# Altium PCB NearField_PCB_Probes.PcbDoc
Units mm, origin at the board's own origin, x right, y up, seen from the top; angles counter-clockwise.
Board outline 100.07 x 27.53 mm, 4 copper layers (Top Layer, Layer 1, Layer 2, Bottom Layer), stack 1.57 mm thick; 2 components, 3 nets, 39 pads, 966 vias.
Unrouted connection lines stored in the file: 961.
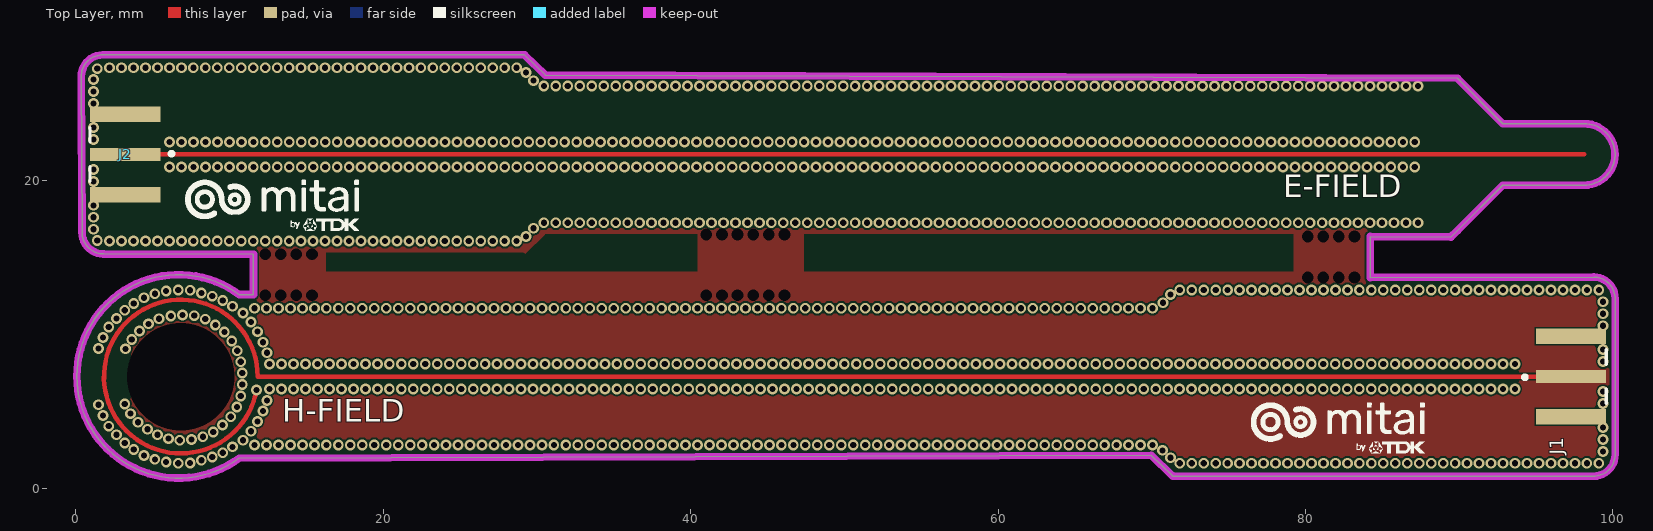
[diagram p0: Top Layer view]
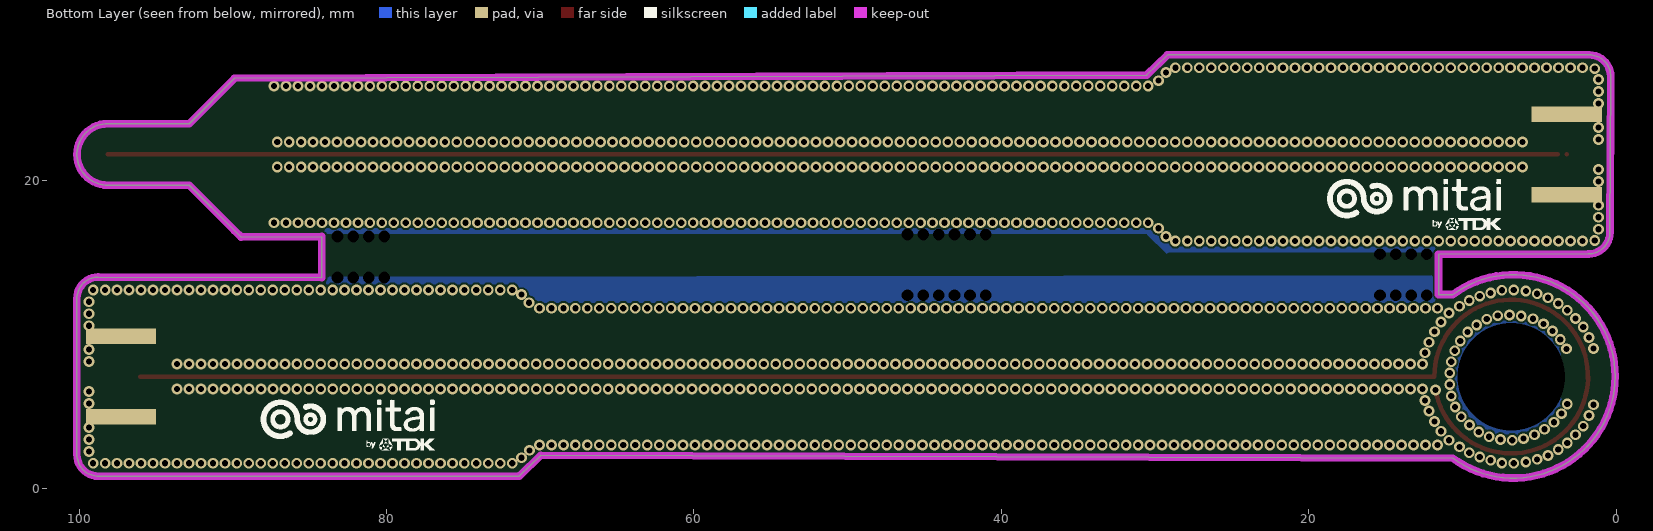
[diagram p1: Bottom Layer view, seen from below]
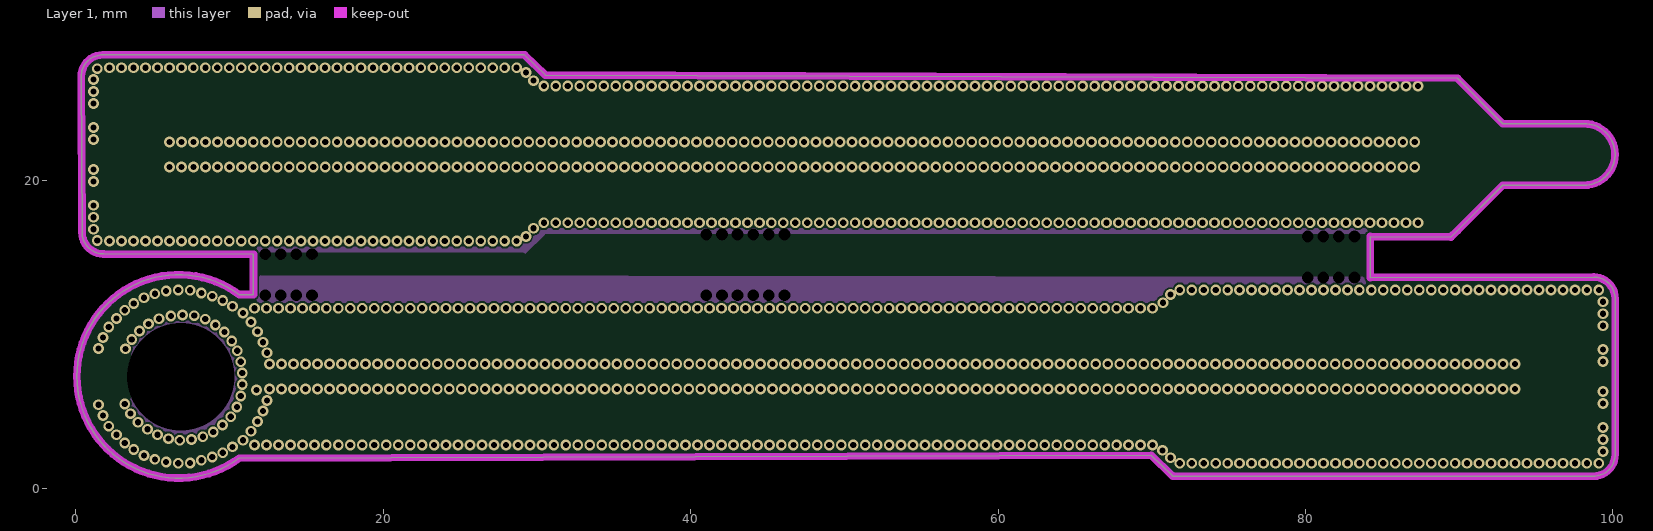
[diagram p2: Layer 1]
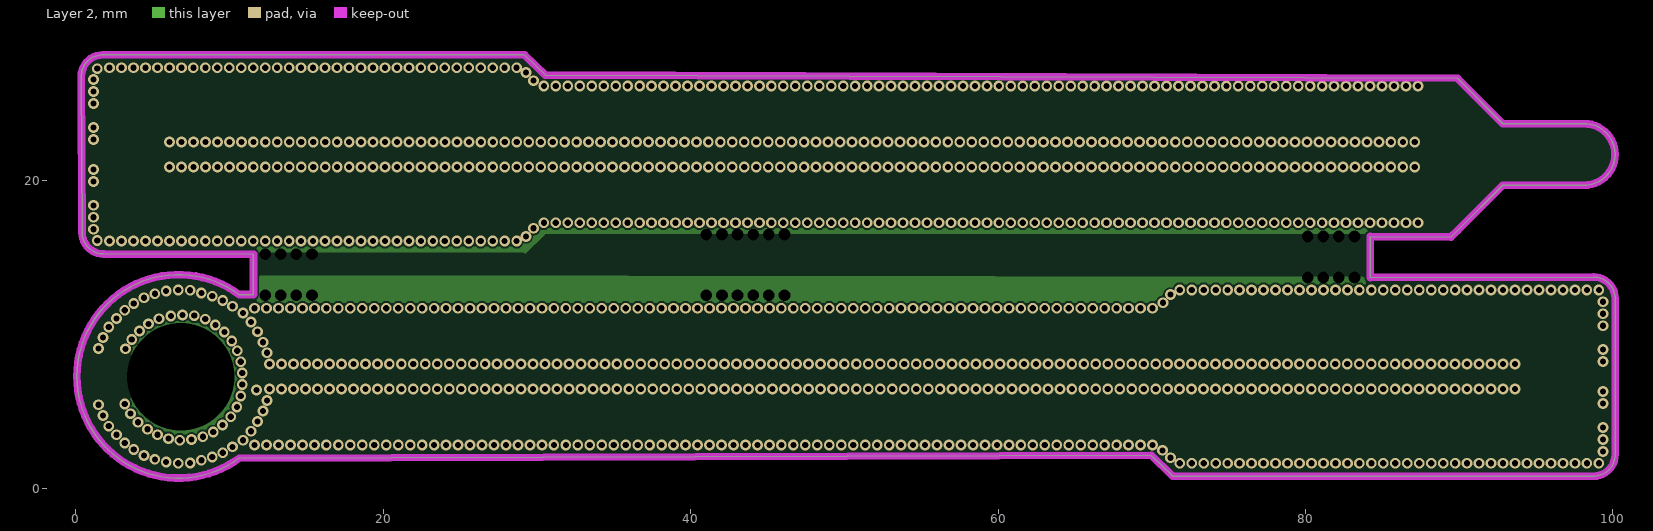
[diagram p3: Layer 2]

## Layer stack, top to bottom
Top Solder: solder mask 0.0127, Solder Resist, Dk 3.8
Top Layer: signal copper 0.035
Dielectric 2: prepreg 0.2, PP-006, Dk 4.6
Layer 1: signal copper 0.0175
Dielectric 1: dielectric 1.065, FR-4, Dk 4.6
Layer 2: signal copper 0.0175
Dielectric 3: prepreg 0.2, PP-006, Dk 4.6
Bottom Layer: signal copper 0.035
Bottom Solder: solder mask 0.0127, Solder Resist, Dk 3.8

## Board outline
10.627,1.965 cw(c6.692,7.287) 10.627,12.608 11.557,12.608 11.557,15.24 1.808,15.248 cw(c1.808,16.645) 0.411,16.645 0.359,26.803 cw(c1.757,26.803) 1.757,28.201 29.187,28.201 30.55,26.886 89.881,26.68 92.837,23.724 98.135,23.724 cw(c98.135,21.724) 98.135,19.724 98.135,19.728 92.837,19.728 92.837,19.724 89.881,16.769 89.461,16.351 84.201,16.383 84.201,13.716 98.743,13.749 cw(c98.743,12.352) 100.141,12.352 100.141,2.194 cw(c98.743,2.194) 98.743,0.796 71.413,0.796 cw(c71.413,0.924) 71.325,0.832 69.962,2.146

## Design rules (kind name [scope] priority, off if disabled: settings)
Clearance [All] p1: gap=0.127 ignorepadtopadclearanceinfootprint=FALSE
DiffPairsRouting [All] p1: maxlimit=0.254 minlimit=0.254 mostfreqgap=0.254 toplayer_minwidth=0.381 toplayer_maxwidth=0.381 toplayer_prefwidth=0.381 midlayer1_minwidth=0.381 midlayer1_maxwidth=0.381 midlayer1_prefwidth=0.381 midlayer2_minwidth=0.381 midlayer2_maxwidth=0.381 midlayer2_prefwidth=0.381 bottomlayer_minwidth=0.381 bottomlayer_maxwidth=0.381 bottomlayer_prefwidth=0.381 substack1={56D14EC7-D852-4B65-881B-8272149A35F8} toplayer_{56d14ec7-d852-4b65-881b-8272149a35f8}_minwidth=0.381 toplayer_{56d14ec7-d852-4b65-881b-8272149a35f8}_maxwidth=0.381 toplayer_{56d14ec7-d852-4b65-881b-8272149a35f8}_prefwidth=0.381 midlayer1_{56d14ec7-d852-4b65-881b-8272149a35f8}_minwidth=0.381 midlayer1_{56d14ec7-d852-4b65-881b-8272149a35f8}_maxwidth=0.381 midlayer1_{56d14ec7-d852-4b65-881b-8272149a35f8}_prefwidth=0.381 midlayer2_{56d14ec7-d852-4b65-881b-8272149a35f8}_minwidth=0.381 midlayer2_{56d14ec7-d852-4b65-881b-8272149a35f8}_maxwidth=0.381 midlayer2_{56d14ec7-d852-4b65-881b-8272149a35f8}_prefwidth=0.381 bottomlayer_{56d14ec7-d852-4b65-881b-8272149a35f8}_minwidth=0.381 bottomlayer_{56d14ec7-d852-4b65-881b-8272149a35f8}_maxwidth=0.381 bottomlayer_{56d14ec7-d852-4b65-881b-8272149a35f8}_prefwidth=0.381 maxuncoupledlength=12.7
PolygonConnect PolygonConnect_5 [All vs IsNamedPolygon('NONET_L-01_P-001')] p1: connectstyle=Direct reliefconductorwidth=0.254 reliefentries=4 polygonreliefangle="90 Angle" airgapwidth=0.254
PolygonConnect PolygonConnect_4 [All vs IsNamedPolygon('PROBE_H_L04_P003')] p2: connectstyle=Direct reliefconductorwidth=0.254 reliefentries=4 polygonreliefangle="90 Angle" airgapwidth=0.254
PolygonConnect PolygonConnect_3 [All vs IsNamedPolygon('PROBE_H_L03_P002')] p3: connectstyle=Direct reliefconductorwidth=0.254 reliefentries=4 polygonreliefangle="90 Angle" airgapwidth=0.254
PolygonConnect PolygonConnect_2 [All vs IsNamedPolygon('PROBE_H_L02_P001')] p4: connectstyle=Direct reliefconductorwidth=0.254 reliefentries=4 polygonreliefangle="90 Angle" airgapwidth=0.254
PolygonConnect PolygonConnect_1 [All vs IsNamedPolygon('PROBE_H_L01_P000')] p5: connectstyle=Direct reliefconductorwidth=0.254 reliefentries=4 polygonreliefangle="90 Angle" airgapwidth=0.254
PolygonConnect [All] p6: connectstyle=Relief reliefconductorwidth=0.254 reliefentries=4 polygonreliefangle="90 Angle" airgapwidth=0.254
RoutingVias [All] p1: holewidth=0.6 width=1.27 viastyle="Through Hole" minholewidth=0.4 minwidth=0.6 maxholewidth=0.711 maxwidth=2
SolderMaskExpansion [All] p1: expansion=0.102 istentingtop=FALSE
Width [All] p1: maxlimit=0.381 minlimit=0.254 preferedwidth=0.293 substack1={56D14EC7-D852-4B65-881B-8272149A35F8}
29 further rules are at their usual default settings.

## Classes and differential pairs
component class NearField_E_Probe: J2
component class NearField_H_Probe: J1

## Components (designator, comment, footprint, x,y, rotation, side; value= is the part's Value field where it differs from the comment)
J1 "SMA" "SMA Edge Launch (Horizontal)" 104.313,7.274 r270 top
J2 "SMA" "SMA Edge Launch (Horizontal)" -3.813,21.724 r90 top

## Footprints (in the part's own frame and the unit in brackets; to place one, negate y for a bottom-side part, rotate by r counter-clockwise, add the part's x,y. Pads: shape width x height; smd on the part's side, far side on the other; paste and mask are expansions set on the pad)
"SMA Edge Launch (Horizontal)" [mm]
  rect 0.85x4.56 smd paste+0 mask+0: 1(0,-7.03)
  rect 1x4.56 smd paste+0 mask+0: 2(-2.62,-7.03) 2(2.62,-7.03)
  rect 1x4.56 smd far side paste+0 mask+0: 2(-2.62,-7.03) 2(2.62,-7.03)
  silkscreen extent -1.75,-10.17 1.75,-4.75, body extent -3.19,-8.25 3.19,5.05, height 3.58

## Part data
J1 J2: "SMA Connector", Supplier Part Number 1=A97594-ND, Supplier 1=Digi-Key

## Free pads (board coordinates)
  round 0 hole 7: 2(6.835,7.274)
  round 0 hole 0.762: 3(12.319,12.573) 3(12.319,15.24) 3(13.335,12.573) 3(13.335,15.24) 3(14.351,12.573) 3(14.351,15.24) 3(15.367,12.573) 3(15.367,15.24) 3(41.021,12.573) 3(41.021,16.51) 3(42.037,12.573) 3(42.037,16.51) 3(43.053,12.573) 3(43.053,16.51) 3(44.069,12.573) 3(44.069,16.51) 3(45.085,12.573) 3(45.085,16.51) 3(46.101,12.573) 3(46.101,16.51) 3(80.137,13.716) 3(80.137,16.383) 3(81.153,13.716) 3(81.153,16.383) 3(82.169,13.716) 3(82.169,16.383) 3(83.185,13.716) 3(83.185,16.383)

## Via types
v1: diameter 0.7, hole 0.4, Top Layer to Bottom Layer, tented both sides, 966 vias

## Nets (pads, with @x,y where several pads share a name; then routed paths per layer and width w, separated by ;. In a path a pad name is that pad's centre, name@x,y a point inside that pad or via, vN(x,y) a via of type N, cw(c..) or ccw(c..) an arc to the next point about the centre after c; other vN are vias at no path point)
GND: J1.2 J2.2
  other v1: 6.668,1.635 71.819,1.635 72.598,1.635 73.377,1.635 74.156,1.635 74.935,1.635 75.713,1.635 76.492,1.635 77.271,1.635 78.05,1.635 78.829,1.635 79.608,1.635 80.387,1.635 81.166,1.635 81.945,1.635 82.724,1.635 83.503,1.635 84.282,1.635 85.061,1.635 85.84,1.635 86.619,1.635 87.397,1.635 88.176,1.635 88.955,1.635 89.734,1.635 90.513,1.635 91.292,1.635 92.071,1.635 92.85,1.635 93.629,1.635 94.408,1.635 95.187,1.635 95.966,1.635 96.745,1.635 97.524,1.635 98.302,1.635 99.081,1.635 7.44,1.657 5.881,1.711 8.171,1.83 5.144,1.889 71.209,1.991 8.878,2.041 4.433,2.143 9.564,2.321 99.353,2.405 70.701,2.473 3.772,2.524 10.199,2.703 11.629,2.829 12.408,2.829 13.187,2.829 13.966,2.829 14.745,2.829 15.524,2.829 16.303,2.829 17.082,2.829 17.861,2.829 18.64,2.829 19.419,2.829 20.198,2.829 20.977,2.829 21.756,2.829 22.534,2.829 23.313,2.829 24.092,2.829 24.871,2.829 25.65,2.829 26.429,2.829 27.208,2.829 27.987,2.829 28.766,2.829 29.545,2.829 30.324,2.829 31.103,2.829 31.882,2.829 32.661,2.829 33.439,2.829 34.218,2.829 34.997,2.829 35.776,2.829 36.555,2.829 37.334,2.829 38.113,2.829 38.892,2.829 39.671,2.829 40.45,2.829 41.229,2.829 42.008,2.829 42.787,2.829 43.566,2.829 44.345,2.829 45.123,2.829 45.902,2.829 46.681,2.829 47.46,2.829 48.239,2.829 49.018,2.829 49.797,2.829 50.576,2.829 51.355,2.829 52.134,2.829 52.913,2.829 53.692,2.829 54.471,2.829 55.25,2.829 56.029,2.829 56.807,2.829 57.586,2.829 58.365,2.829 59.144,2.829 59.923,2.829 60.702,2.829 61.481,2.829 62.26,2.829 63.039,2.829 63.818,2.829 64.597,2.829 65.376,2.829 66.155,2.829 66.934,2.829 67.712,2.829 68.491,2.829 69.27,2.829 70.049,2.829 3.188,2.956 6.77,3.134 10.884,3.134 10.884,3.134 7.532,3.184 99.353,3.184 6.033,3.235 8.268,3.362 2.655,3.489 5.322,3.489 8.945,3.664 11.392,3.718 4.661,3.845 99.353,3.963 2.147,4.048 9.543,4.122 4.052,4.302 11.824,4.353 10.079,4.658 1.766,4.734 3.569,4.861 12.18,5.039 10.478,5.293 1.486,5.445 3.188,5.496 99.353,5.521 12.434,5.724 10.732,6.004 99.353,6.3 11.759,6.406 12.612,6.461 13.39,6.461 14.169,6.461 14.948,6.461 15.727,6.461 16.506,6.461 17.285,6.461 18.064,6.461 18.843,6.461 19.622,6.461 20.401,6.461 21.18,6.461 21.959,6.461 22.738,6.461 23.517,6.461 24.296,6.461 25.074,6.461 25.853,6.461 26.632,6.461 27.411,6.461 28.19,6.461 28.969,6.461 29.748,6.461 30.527,6.461 31.306,6.461 32.085,6.461 32.864,6.461 33.643,6.461 34.422,6.461 35.201,6.461 35.979,6.461 36.758,6.461 37.537,6.461 38.316,6.461 39.095,6.461 39.874,6.461 40.653,6.461 41.432,6.461 42.211,6.461 42.99,6.461 43.769,6.461 44.548,6.461 45.327,6.461 46.106,6.461 46.885,6.461 47.663,6.461 48.442,6.461 49.221,6.461 50,6.461 50.779,6.461 51.558,6.461 52.337,6.461 53.116,6.461 53.895,6.461 54.674,6.461 55.453,6.461 56.232,6.461 57.011,6.461 57.79,6.461 58.569,6.461 59.347,6.461 60.126,6.461 60.905,6.461 61.684,6.461 62.463,6.461 63.242,6.461 64.021,6.461 64.8,6.461 65.579,6.461 66.358,6.461 67.137,6.461 67.916,6.461 68.695,6.461 69.474,6.461 70.252,6.461 71.031,6.461 71.81,6.461 72.589,6.461 73.368,6.461 74.147,6.461 74.926,6.461 75.705,6.461 76.484,6.461 77.263,6.461 78.042,6.461 78.821,6.461 79.6,6.461 80.379,6.461 81.158,6.461 81.936,6.461 82.715,6.461 83.494,6.461 84.273,6.461 85.052,6.461 85.831,6.461 86.61,6.461 87.389,6.461 88.168,6.461 88.947,6.461 89.726,6.461 90.505,6.461 91.284,6.461 92.063,6.461 92.842,6.461 93.62,6.461 10.834,6.766 10.834,7.502 12.612,8.087 13.39,8.087 14.169,8.087 14.948,8.087 15.727,8.087 16.506,8.087 17.285,8.087 18.064,8.087 18.843,8.087 19.622,8.087 20.401,8.087 21.18,8.087 21.959,8.087 22.738,8.087 23.517,8.087 24.296,8.087 25.074,8.087 25.853,8.087 26.632,8.087 27.411,8.087 28.19,8.087 28.969,8.087 29.748,8.087 30.527,8.087 31.306,8.087 32.085,8.087 32.864,8.087 33.643,8.087 34.422,8.087 35.201,8.087 35.979,8.087 36.758,8.087 37.537,8.087 38.316,8.087 39.095,8.087 39.874,8.087 40.653,8.087 41.432,8.087 42.211,8.087 42.99,8.087 43.769,8.087 44.548,8.087 45.327,8.087 46.106,8.087 46.885,8.087 47.663,8.087 48.442,8.087 49.221,8.087 50,8.087 50.779,8.087 51.558,8.087 52.337,8.087 53.116,8.087 53.895,8.087 54.674,8.087 55.453,8.087 56.232,8.087 57.011,8.087 57.79,8.087 58.569,8.087 59.347,8.087 60.126,8.087 60.905,8.087 61.684,8.087 62.463,8.087 63.242,8.087 64.021,8.087 64.8,8.087 65.579,8.087 66.358,8.087 67.137,8.087 67.916,8.087 68.695,8.087 69.474,8.087 70.252,8.087 71.031,8.087 71.81,8.087 72.589,8.087 73.368,8.087 74.147,8.087 74.926,8.087 75.705,8.087 76.484,8.087 77.263,8.087 78.042,8.087 78.821,8.087 79.6,8.087 80.379,8.087 81.158,8.087 81.936,8.087 82.715,8.087 83.494,8.087 84.273,8.087 85.052,8.087 85.831,8.087 86.61,8.087 87.389,8.087 88.168,8.087 88.947,8.087 89.726,8.087 90.505,8.087 91.284,8.087 92.063,8.087 92.842,8.087 93.62,8.087 10.732,8.239 99.353,8.247 12.434,8.823 10.503,8.95 99.353,9.026 3.239,9.077 1.486,9.103 12.18,9.509 10.148,9.585 3.645,9.687 1.766,9.814 9.665,10.169 11.824,10.195 4.153,10.246 2.147,10.5 99.353,10.584 9.081,10.627 4.738,10.703 11.392,10.83 8.421,11.008 5.423,11.033 2.655,11.058 6.185,11.211 7.709,11.236 6.947,11.287 99.353,11.363 10.884,11.414 3.188,11.592 11.629,11.719 12.408,11.719 13.187,11.719 13.966,11.719 14.745,11.719 15.524,11.719 16.303,11.719 17.082,11.719 17.861,11.719 18.64,11.719 19.419,11.719 20.198,11.719 20.977,11.719 21.756,11.719 22.534,11.719 23.313,11.719 24.092,11.719 24.871,11.719 25.65,11.719 26.429,11.719 27.208,11.719 27.987,11.719 28.766,11.719 29.545,11.719 30.324,11.719 31.103,11.719 31.882,11.719 32.661,11.719 33.439,11.719 34.218,11.719 34.997,11.719 35.776,11.719 36.555,11.719 37.334,11.719 38.113,11.719 38.892,11.719 39.671,11.719 40.45,11.719 41.229,11.719 42.008,11.719 42.787,11.719 43.566,11.719 44.345,11.719 45.123,11.719 45.902,11.719 46.681,11.719 47.46,11.719 48.239,11.719 49.018,11.719 49.797,11.719 50.576,11.719 51.355,11.719 52.134,11.719 52.913,11.719 53.692,11.719 54.471,11.719 55.25,11.719 56.029,11.719 56.807,11.719 57.586,11.719 58.365,11.719 59.144,11.719 59.923,11.719 60.702,11.719 61.481,11.719 62.26,11.719 63.039,11.719 63.818,11.719 64.597,11.719 65.376,11.719 66.155,11.719 66.934,11.719 67.712,11.719 68.491,11.719 69.27,11.719 70.049,11.719 10.199,11.844 3.772,12.024 70.727,12.074 99.353,12.142 9.564,12.227 4.433,12.405 8.878,12.506 71.209,12.608 5.144,12.659 8.171,12.718 5.881,12.836 7.44,12.891 6.668,12.913 71.819,12.913 72.598,12.913 73.377,12.913 74.156,12.913 74.935,12.913 75.713,12.913 76.492,12.913 77.271,12.913 78.05,12.913 78.829,12.913 79.608,12.913 80.387,12.913 81.166,12.913 81.945,12.913 82.724,12.913 83.503,12.913 84.282,12.913 85.061,12.913 85.84,12.913 86.619,12.913 87.397,12.913 88.176,12.913 88.955,12.913 89.734,12.913 90.513,12.913 91.292,12.913 92.071,12.913 92.85,12.913 93.629,12.913 94.408,12.913 95.187,12.913 95.966,12.913 96.745,12.913 97.524,12.913 98.302,12.913 99.081,12.913 2.198,16.085 2.976,16.085 3.755,16.085 4.534,16.085 5.313,16.085 6.092,16.085 6.871,16.085 7.65,16.085 8.429,16.085 9.208,16.085 9.987,16.085 10.766,16.085 11.545,16.085 12.324,16.085 13.103,16.085 13.881,16.085 14.66,16.085 15.439,16.085 16.218,16.085 16.997,16.085 17.776,16.085 18.555,16.085 19.334,16.085 20.113,16.085 20.892,16.085 21.671,16.085 22.45,16.085 22.45,16.085 23.229,16.085 24.008,16.085 24.787,16.085 25.565,16.085 26.344,16.085 27.123,16.085 27.902,16.085 28.681,16.085 1.397,16.129 29.291,16.39 1.147,16.856 29.773,16.924 30.451,17.279 31.23,17.279 32.009,17.279 32.787,17.279 33.566,17.279 34.345,17.279 35.124,17.279 35.903,17.279 36.682,17.279 37.461,17.279 38.24,17.279 39.019,17.279 39.798,17.279 40.577,17.279 41.356,17.279 42.135,17.279 42.914,17.279 43.693,17.279 44.471,17.279 45.25,17.279 46.029,17.279 46.808,17.279 47.587,17.279 48.366,17.279 49.145,17.279 49.924,17.279 50.703,17.279 51.482,17.279 52.261,17.279 53.04,17.279 53.819,17.279 54.598,17.279 55.377,17.279 56.155,17.279 56.934,17.279 57.713,17.279 58.492,17.279 59.271,17.279 60.05,17.279 60.829,17.279 61.608,17.279 62.387,17.279 63.166,17.279 63.945,17.279 64.724,17.279 65.503,17.279 66.282,17.279 67.06,17.279 67.839,17.279 68.618,17.279 69.397,17.279 70.176,17.279 70.955,17.279 71.734,17.279 72.513,17.279 73.292,17.279 74.071,17.279 74.85,17.279 75.629,17.279 76.408,17.279 77.187,17.279 77.966,17.279 78.744,17.279 79.523,17.279 80.302,17.279 81.081,17.279 81.86,17.279 82.639,17.279 83.418,17.279 84.197,17.279 84.976,17.279 85.755,17.279 86.534,17.279 87.313,17.279 1.147,17.635 1.147,18.414 1.147,19.972 1.147,20.751 6.101,20.911 6.88,20.911 7.658,20.911 8.437,20.911 9.216,20.911 9.995,20.911 10.774,20.911 11.553,20.911 12.332,20.911 13.111,20.911 13.89,20.911 14.669,20.911 15.448,20.911 16.227,20.911 17.006,20.911 17.785,20.911 18.564,20.911 19.342,20.911 20.121,20.911 20.9,20.911 21.679,20.911 22.458,20.911 23.237,20.911 24.016,20.911 24.795,20.911 25.574,20.911 26.353,20.911 27.132,20.911 27.911,20.911 28.69,20.911 29.469,20.911 30.248,20.911 31.026,20.911 31.805,20.911 32.584,20.911 33.363,20.911 34.142,20.911 34.921,20.911 35.7,20.911 36.479,20.911 37.258,20.911 38.037,20.911 38.816,20.911 39.595,20.911 40.374,20.911 41.153,20.911 41.931,20.911 42.71,20.911 43.489,20.911 44.268,20.911 45.047,20.911 45.826,20.911 46.605,20.911 47.384,20.911 48.163,20.911 48.942,20.911 49.721,20.911 50.5,20.911 51.279,20.911 52.058,20.911 52.837,20.911 53.615,20.911 54.394,20.911 55.173,20.911 55.952,20.911 56.731,20.911 57.51,20.911 58.289,20.911 59.068,20.911 59.847,20.911 60.626,20.911 61.405,20.911 62.184,20.911 62.963,20.911 63.742,20.911 64.52,20.911 65.299,20.911 66.078,20.911 66.857,20.911 67.636,20.911 68.415,20.911 69.194,20.911 69.973,20.911 70.752,20.911 71.531,20.911 72.31,20.911 73.089,20.911 73.868,20.911 74.647,20.911 75.426,20.911 76.204,20.911 76.983,20.911 77.762,20.911 78.541,20.911 79.32,20.911 80.099,20.911 80.878,20.911 81.657,20.911 82.436,20.911 83.215,20.911 83.994,20.911 84.773,20.911 85.552,20.911 86.331,20.911 87.11,20.911 6.101,22.537 6.88,22.537 7.658,22.537 8.437,22.537 9.216,22.537 9.995,22.537 10.774,22.537 11.553,22.537 12.332,22.537 13.111,22.537 13.89,22.537 14.669,22.537 15.448,22.537 16.227,22.537 17.006,22.537 17.785,22.537 18.564,22.537 19.342,22.537 20.121,22.537 20.9,22.537 21.679,22.537 22.458,22.537 23.237,22.537 24.016,22.537 24.795,22.537 25.574,22.537 26.353,22.537 27.132,22.537 27.911,22.537 28.69,22.537 29.469,22.537 30.248,22.537 31.026,22.537 31.805,22.537 32.584,22.537 33.363,22.537 34.142,22.537 34.921,22.537 35.7,22.537 36.479,22.537 37.258,22.537 38.037,22.537 38.816,22.537 39.595,22.537 40.374,22.537 41.153,22.537 41.931,22.537 42.71,22.537 43.489,22.537 44.268,22.537 45.047,22.537 45.826,22.537 46.605,22.537 47.384,22.537 48.163,22.537 48.942,22.537 49.721,22.537 50.5,22.537 51.279,22.537 52.058,22.537 52.837,22.537 53.615,22.537 54.394,22.537 55.173,22.537 55.952,22.537 56.731,22.537 57.51,22.537 58.289,22.537 59.068,22.537 59.847,22.537 60.626,22.537 61.405,22.537 62.184,22.537 62.963,22.537 63.742,22.537 64.52,22.537 65.299,22.537 66.078,22.537 66.857,22.537 67.636,22.537 68.415,22.537 69.194,22.537 69.973,22.537 70.752,22.537 71.531,22.537 72.31,22.537 73.089,22.537 73.868,22.537 74.647,22.537 75.426,22.537 76.204,22.537 76.983,22.537 77.762,22.537 78.541,22.537 79.32,22.537 80.099,22.537 80.878,22.537 81.657,22.537 82.436,22.537 83.215,22.537 83.994,22.537 84.773,22.537 85.552,22.537 86.331,22.537 87.11,22.537 1.147,22.698 1.147,23.477 1.147,25.035 1.147,25.814 30.451,26.169 31.23,26.169 32.009,26.169 32.787,26.169 33.566,26.169 34.345,26.169 35.124,26.169 35.903,26.169 36.682,26.169 37.461,26.169 38.24,26.169 39.019,26.169 39.798,26.169 40.577,26.169 41.356,26.169 42.135,26.169 42.914,26.169 43.693,26.169 44.471,26.169 45.25,26.169 46.029,26.169 46.808,26.169 47.587,26.169 48.366,26.169 49.145,26.169 49.924,26.169 50.703,26.169 51.482,26.169 52.261,26.169 53.04,26.169 53.819,26.169 54.598,26.169 55.377,26.169 56.155,26.169 56.934,26.169 57.713,26.169 58.492,26.169 59.271,26.169 60.05,26.169 60.829,26.169 61.608,26.169 62.387,26.169 63.166,26.169 63.945,26.169 64.724,26.169 65.503,26.169 66.282,26.169 67.06,26.169 67.839,26.169 68.618,26.169 69.397,26.169 70.176,26.169 70.955,26.169 71.734,26.169 72.513,26.169 73.292,26.169 74.071,26.169 74.85,26.169 75.629,26.169 76.408,26.169 77.187,26.169 77.966,26.169 78.744,26.169 79.523,26.169 80.302,26.169 81.081,26.169 81.86,26.169 82.639,26.169 83.418,26.169 84.197,26.169 84.976,26.169 85.755,26.169 86.534,26.169 87.313,26.169 29.773,26.525 1.147,26.593 29.291,27.058 1.397,27.305 2.198,27.363 2.976,27.363 3.755,27.363 4.534,27.363 5.313,27.363 6.092,27.363 6.871,27.363 7.65,27.363 8.429,27.363 9.208,27.363 9.987,27.363 10.766,27.363 11.545,27.363 12.324,27.363 13.103,27.363 13.881,27.363 14.66,27.363 15.439,27.363 16.218,27.363 16.997,27.363 17.776,27.363 18.555,27.363 19.334,27.363 20.113,27.363 20.892,27.363 21.671,27.363 22.45,27.363 22.45,27.363 23.229,27.363 24.008,27.363 24.787,27.363 25.565,27.363 26.344,27.363 27.123,27.363 27.902,27.363 28.681,27.363
PROBE: J2.1 | length 94.3
  Top Layer w0.293: J2.1@3.81,21.724 89.819,21.724 98.135,21.724
PROBE_H: J1.1 pad.2 pad.3 | length 114.7
  Top Layer w0.293: 11.759,6.406 cw(c6.835,7.274) 11.835,7.274 J1.1@96.012,7.274
copper on no net: | length 0

## Polygon pours and split planes (outlines as drawn)
PROBE_H on Layer 1 "NONET_L-01_P-001" (solid, remove dead copper, pour order 6): 87.504,26.68 30.708,26.68 29.187,28.201 0.534,28.197 0.411,28.074 0.411,15.374 29.112,15.374 29.238,15.248 30.501,16.51 30.501,16.557 87.456,16.557
PROBE_H on Layer 1 "PROBE_H_L02_P001" (solid, remove dead copper, pour order 1): 0.013,0.924 0.267,13.878 100.216,13.751 100.47,0.797
PROBE_H on Layer 2 "NONET_L-01_P-001" (solid, remove dead copper, pour order 7): 87.499,26.68 30.708,26.68 29.187,28.201 0.534,28.197 0.411,28.074 0.411,15.374 29.112,15.374 29.238,15.248 30.501,16.51 30.501,16.557 87.451,16.557
PROBE_H on Layer 2 "PROBE_H_L03_P002" (solid, remove dead copper, pour order 2): 0.013,0.924 0.013,13.878 100.343,13.751 100.343,0.797
PROBE_H on Bottom Layer "NONET_L-01_P-001" (solid, remove dead copper, pour order 8): 87.504,26.68 30.708,26.68 29.187,28.201 0.534,28.197 0.411,28.074 0.411,15.374 29.112,15.374 29.238,15.248 30.501,16.51 30.501,16.557 87.456,16.557
PROBE_H on Bottom Layer "PROBE_H_L04_P003" (solid, remove dead copper, pour order 3): 0.013,13.878 0.013,0.924 100.216,0.67 100.216,13.751
PROBE_H on Top Layer "NONET_L-01_P-001" (solid, remove dead copper, pour order 5): 87.509,26.68 30.708,26.68 29.187,28.201 0.534,28.197 0.411,28.074 0.411,15.374 29.112,15.374 29.238,15.248 30.501,16.51 30.501,16.557 87.461,16.557
PROBE_H on Top Layer "PROBE_H_L01_P000" (solid, remove dead copper, pour order 0): 100.211,14.081 0.421,14.081 0,0.5 100.316,0.3
PROBE_H on Top Layer "NONET_L-01_P-001" (solid, pour order 11): 79.248,17.399 79.248,12.827 84.196,12.827 84.328,12.959 84.328,17.399
PROBE_H on Top Layer "NONET_L-01_P-001" (solid, pour order 10): 40.45,11.719 40.45,17.208 40.386,17.272 47.371,17.272 47.371,12.065 46.99,11.684
PROBE_H on Top Layer "NONET_L-01_P-001" (solid, pour order 9): 11.557,15.875 11.629,15.803 11.629,11.719 16.303,11.719 16.256,11.766 16.256,15.875

## Keep-outs
Keep-Out Layer:
  lines w0.5: 92.837,19.724 89.881,16.769 89.461,16.351 84.201,16.383 84.201,13.716 98.743,13.749 cw(c98.743,12.352) 100.141,12.352 100.141,2.194 cw(c98.743,2.194) 98.743,0.796 71.413,0.796 cw(c71.413,0.924) 71.325,0.832 69.962,2.146 10.627,1.965 cw(c6.692,7.287) 10.627,12.608 11.557,12.608 11.557,15.24 1.808,15.248 cw(c1.808,16.645) 0.411,16.645 0.359,26.803 cw(c1.757,26.803) 1.757,28.201 29.187,28.201 30.55,26.886 89.881,26.68 92.837,23.724 98.135,23.724 cw(c98.135,21.724) 98.135,19.724 ; 92.837,19.728 98.135,19.728

## Other copper
Top Layer:
  pour cut-out: 0.267,8.624 3.786,8.624 3.996,5.924 0.14,5.924
Layer 1:
  pour cut-out: 0.267,8.624 3.786,8.624 3.996,5.924 0.14,5.924
Layer 2:
  pour cut-out: 0.267,8.624 3.786,8.624 3.996,5.924 0.14,5.924
Bottom Layer:
  pour cut-out: 0.267,8.624 3.786,8.624 3.996,5.924 0.14,5.924

## Silkscreen, mask and mechanical layers (free items; w line width, h text height)
Top Overlay:
  drawing of 32 lines, arcs and shapes, not listed
  text "E-FIELD" at 78.546,18.465 h2.54
  text "H-FIELD" at 13.423,3.854 h2.54
Bottom Overlay:
  drawing of 32 lines, arcs and shapes, not listed
Route Tool Path:
  lines w0.5: 16.256,12.7 16.256,15.24 29.238,15.248 30.501,16.557 40.386,16.51 40.386,12.573 16.256,12.7 ; 46.609,12.573 46.609,16.51 79.375,16.383 79.375,13.716 71.221,13.71 69.959,12.401 46.609,12.573